# Altium PCB AnaCompPCB.PcbDoc
Units mil, origin at the board's own origin, x right, y up, seen from the top; angles counter-clockwise.
Board outline 1141.73 x 1417.32 mil, 2 copper layers (Top Layer, Bottom Layer); 19 components, 11 nets, 59 pads, 13 vias.
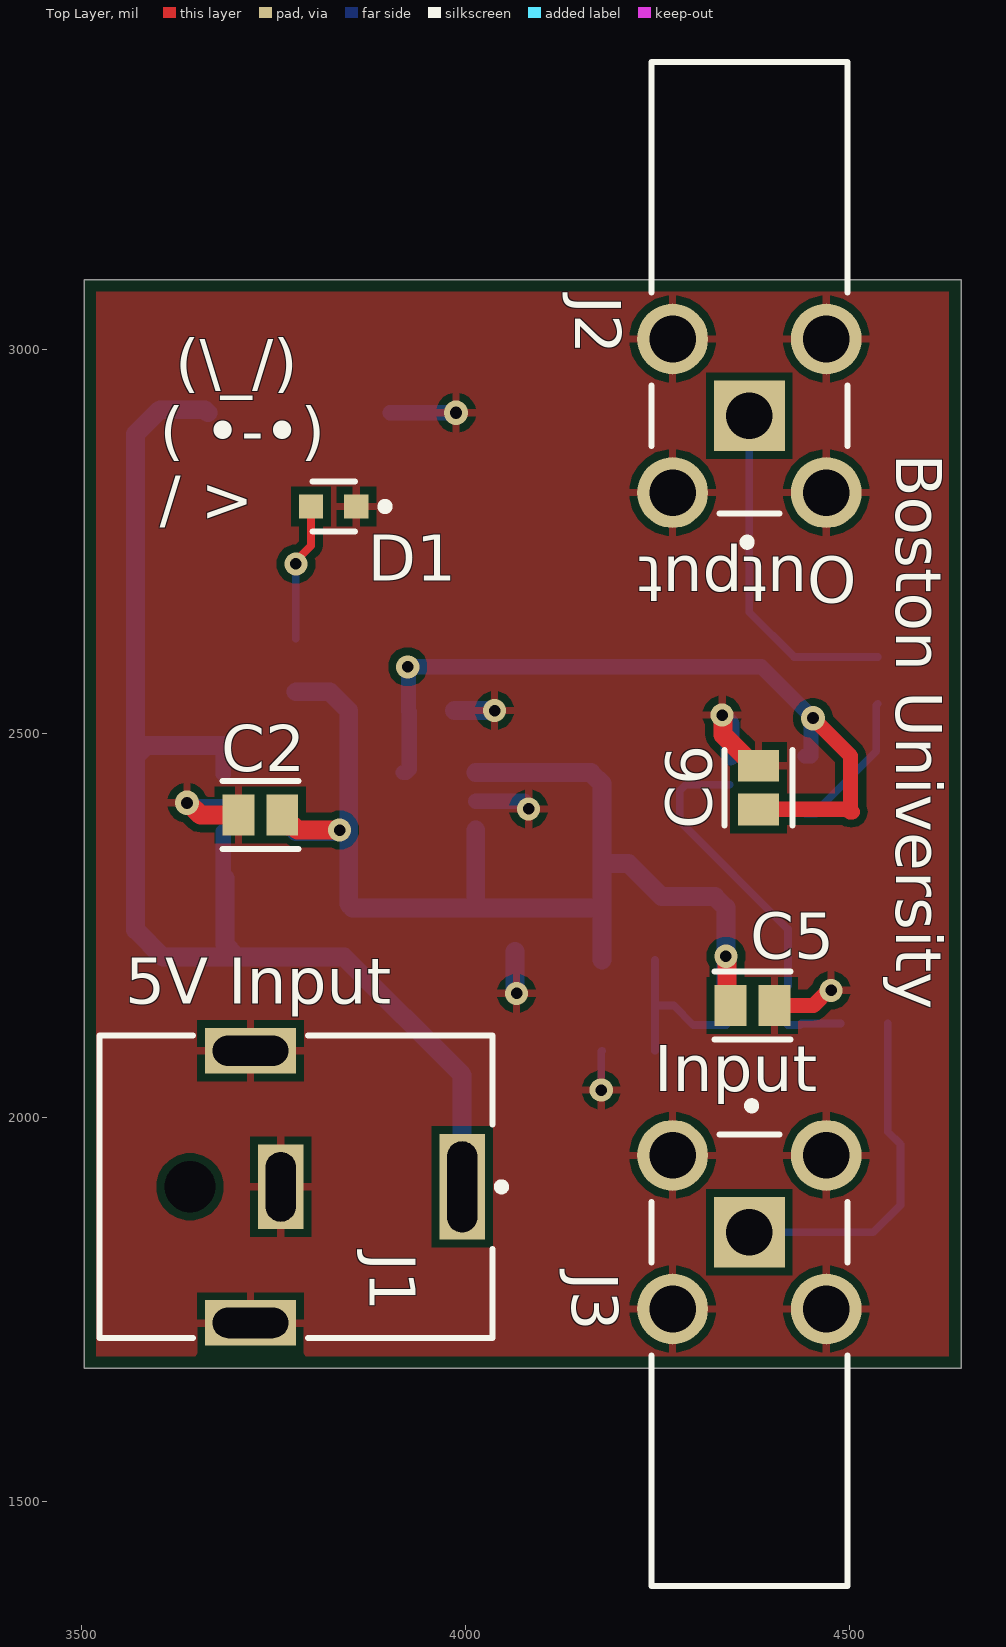
[diagram p0: Top Layer view]
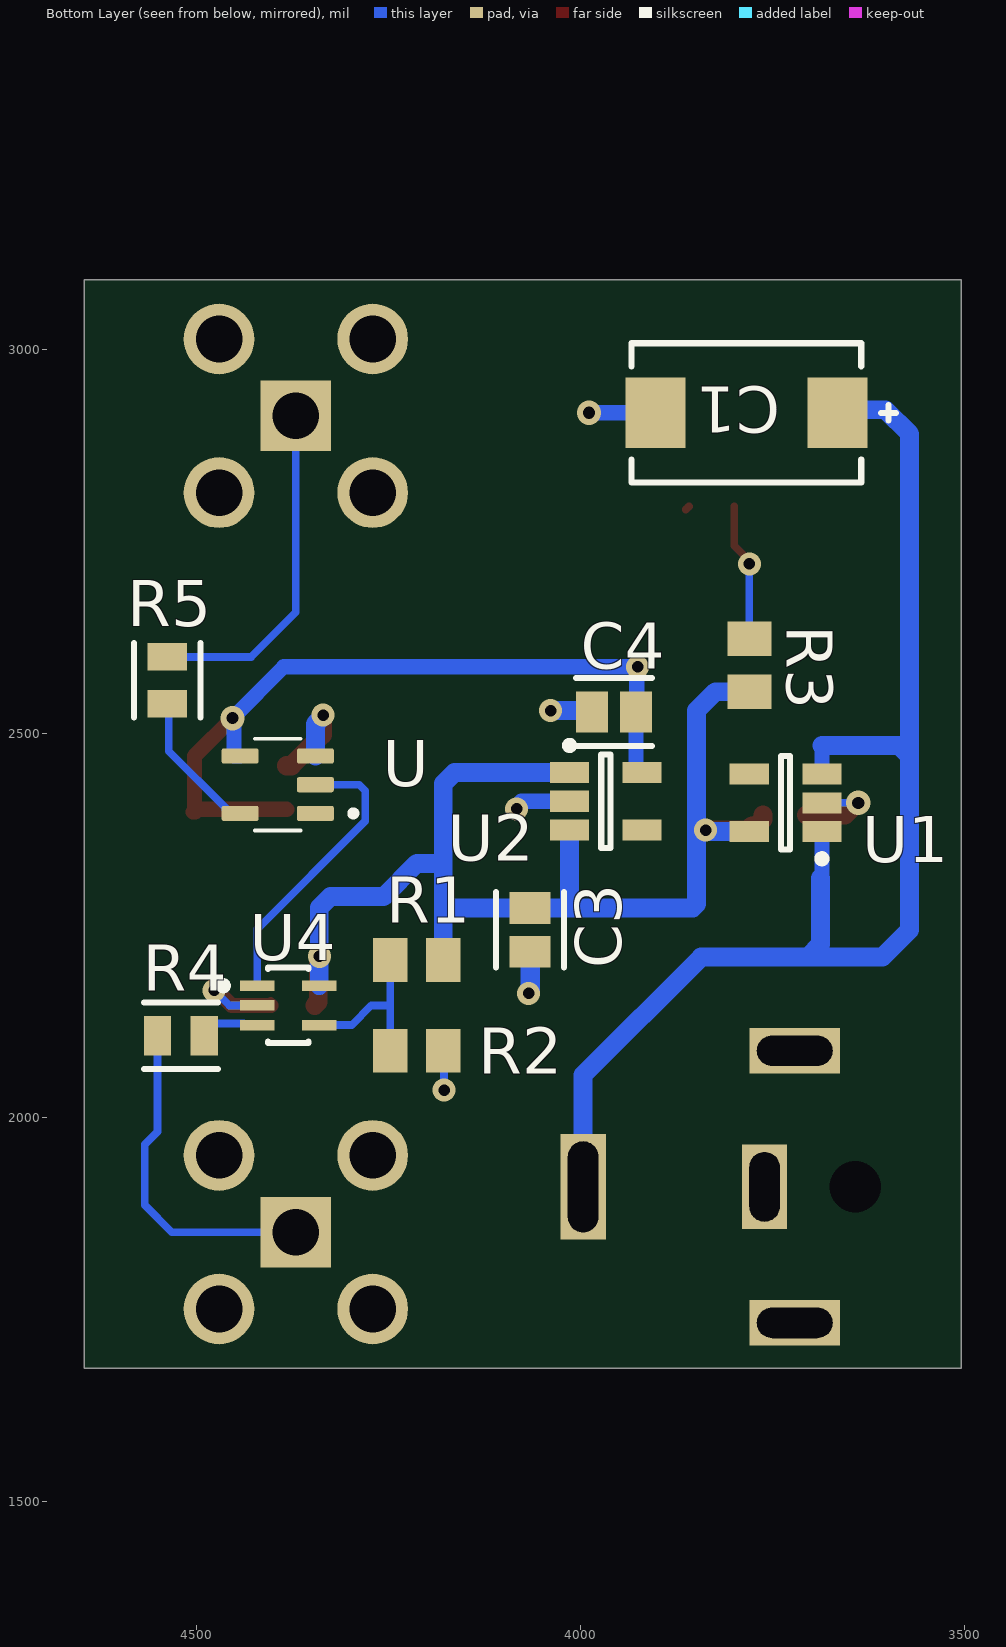
[diagram p1: Bottom Layer view, seen from below]
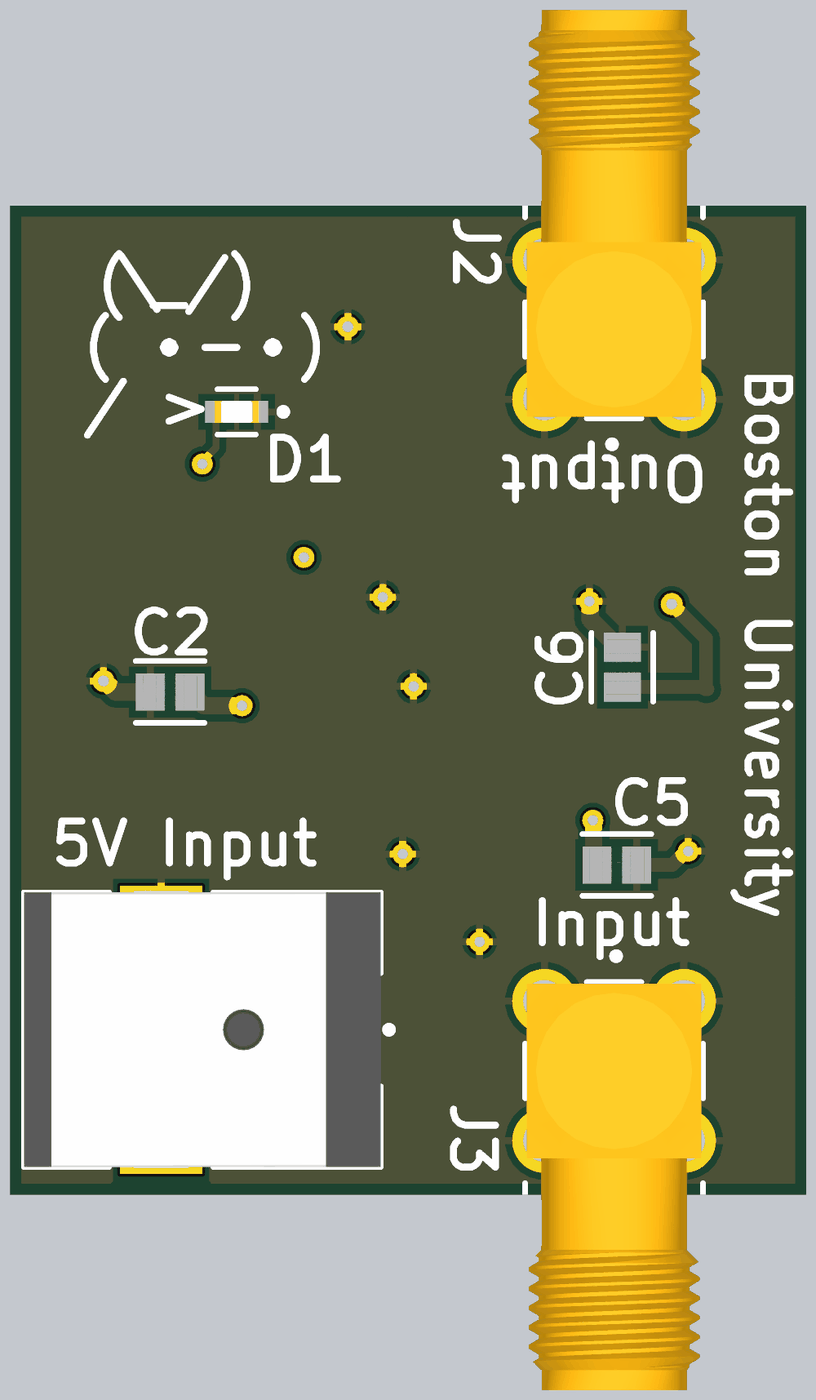
[diagram p2: 3D render of the assembled board from above, using the file's embedded part models]
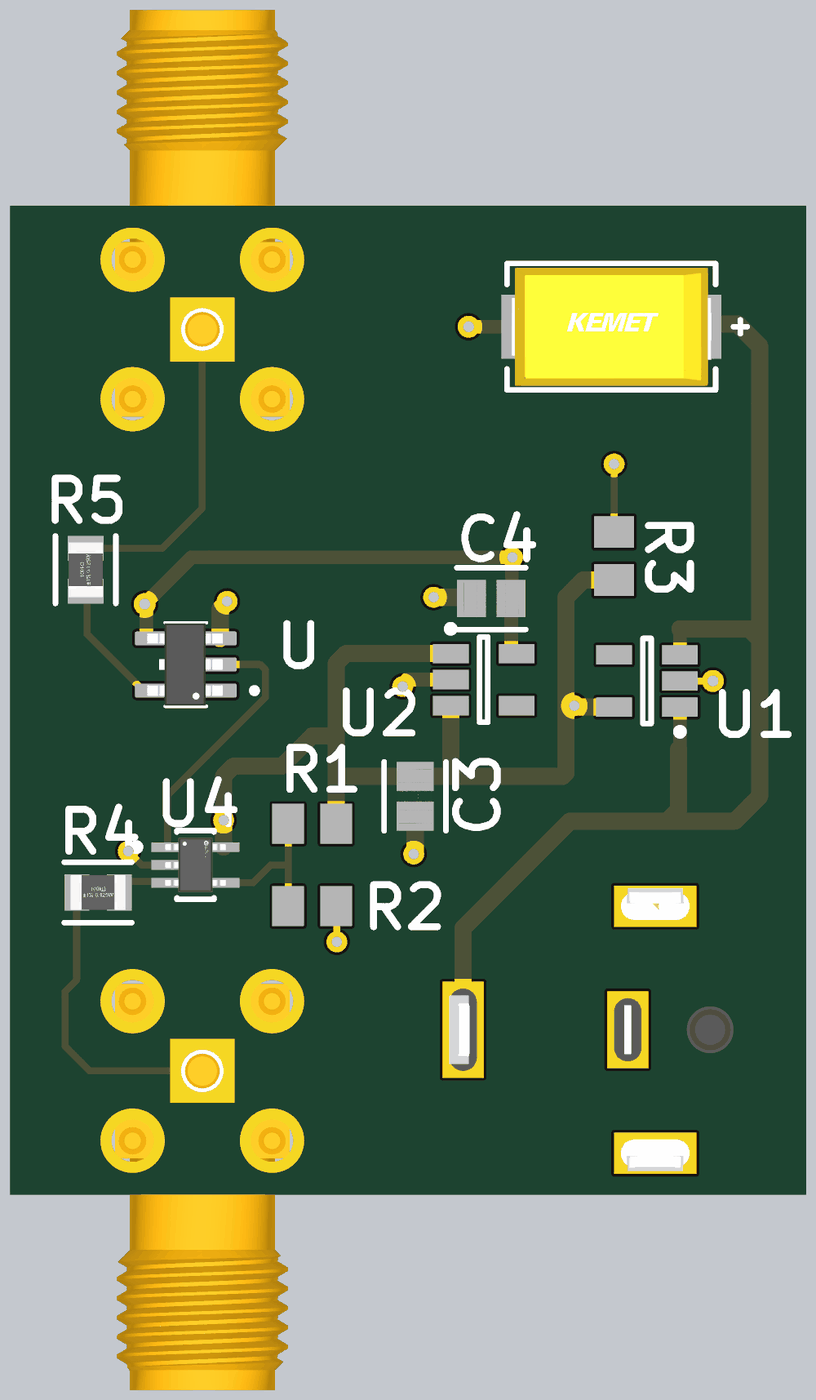
[diagram p3: 3D render of the assembled board from below, using the file's embedded part models]

## Layer stack, top to bottom
Top Solder: solder mask 0.4, Solder Resist, Dk 3.5
Top Layer: signal copper 1.4
Dielectric 1: dielectric 12.6, FR-4, Dk 4.8
Bottom Layer: signal copper 1.4
Bottom Solder: solder mask 0.4, Solder Resist, Dk 3.5

## Board outline
3503.94,1673.23 3503.94,3090.55 4645.67,3090.55 4645.67,1673.23

## Design rules (kind name [scope] priority, off if disabled: settings)
Clearance [All] p1: gap=10 ignorepadtopadclearanceinfootprint=FALSE except(0: Arc-Hole Track-Hole SMDPad-Hole THPad-Hole Via-Hole Fill-Hole Poly-Hole Region-Hole Text-Hole; 9.84: Arc-Arc Arc-Track Arc-SMDPad Arc-THPad Arc-Via Arc-Fill Arc-Poly Arc-Region Track-Track Track-SMDPad Track-THPad Track-Via Track-Fill Track-Poly Track-Region SMDPad-SMDPad SMDPad-THPad SMDPad-Via)
PolygonConnect [All] p1: connectstyle=Relief reliefconductorwidth=10 reliefentries=4 polygonreliefangle="90 Angle" airgapwidth=10
RoutingVias [All] p1: holewidth=15.75 width=31.5 viastyle="Through Hole" minholewidth=15.75 minwidth=31.5 maxholewidth=15.75 maxwidth=31.5
SolderMaskExpansion [All] p1: expansion=4 istentingtop=FALSE
Width [All] p1: maxlimit=27.56 minlimit=10 preferedwidth=10
30 further rules are at their usual default settings.

## Components (designator, comment, footprint, x,y, rotation, side; value= is the part's Value field where it differs from the comment)
C1 "47uF" FP-T491X476K035AT-MFG 3783.46,2917.32 r180 bottom
C2 "0.1uF" FP-CL21-IPC_C 3733.3,2393.7 r180 top
C3 "0.1uF" FP-CL21-IPC_C 4064.96,2244.09 r270 bottom
C4 "0.1uF" FP-CL21-IPC_C 3955.68,2527.56 r0 bottom
C5 "0.1uF" FP-CL21-IPC_C 4374.02,2145.67 r180 top
C6 "0.1uF" FP-CL21-IPC_C 4381.89,2429.13 r90 top
D1 "LTST-C193KRKT-5A" FP-LTST-C193KRKT-5A-MFG 3828.74,2795.28 r180 top
J1 "PJ-063AH" CUI-PJ-063AH_V 3759.84,1909.45 r180 top
J2 "73391-0083" FP-73391-0083-MFG 4370.08,3079.92 r270 top
J3 "73391-0083" FP-73391-0083-MFG 4370.08,1683.86 r90 top
R1 "149K ohm" RESC2013X50X40NL20T20 4212.6,2204.72 r180 bottom
R2 "12K ohm" RESC2013X50X40NL20T20 4212.6,2086.61 r0 bottom
R3 "1K ohm" RESC2013X50X40NL20T20 3779.53,2588.58 r270 bottom
R4 "33 ohm" FP-CRGCQ0805-IPC_C 4519.69,2106.3 r180 bottom value=33Ω
R5 "33 ohm" FP-CRGCQ0805-IPC_C 4537.4,2568.9 r90 bottom value=33Ω
U "74LV1T34GV-Q100H" SOT95P275X110-5N 4393.7,2433.07 r0 bottom
U1 "MCP1801T-3302I/OT" SOT-23-OT5_M 3732.28,2409.45 r0 bottom
U2 "MCP1801T-1802I/OT" SOT-23-OT5_M 3966.54,2411.42 r180 bottom
U4 "MAX49140AXK/V+" FP-X5-1C-MFG 4379.92,2145.67 r180 bottom

## Footprints (in the part's own frame and the unit in brackets; to place one, negate y for a bottom-side part, rotate by r counter-clockwise, add the part's x,y. Pads: shape width x height; smd on the part's side, far side on the other; paste and mask are expansions set on the pad)
CUI-PJ-063AH_V [mm] "THD, 2-Leads, Body 13x10mm, Height 9mm"
  rect 1.5x3.5 hole 1 slot 3 at 90 deg: 1(-6,0)
  rect 1.5x2.8 hole 1 slot 2.3 at 90 deg: 2(0,0)
  rect 3x1.5 hole 1 slot 2.5 at 0 deg: 3(1,4.5) 4(1,-4.5)
  round 1.4 hole 1.7 unplated: 5(3,0)
  silkscreen extent -7.42,-5 6,5, body extent -7,-5.15 6,5.15, height 9
FP-73391-0083-MFG [mm]
  rect 2.34x2.34 hole 1.54 paste-1000 mask+0: 1(4.23,0)
  round 2.34 hole 1.54 paste-1000 mask+0: 2(1.69,2.54) 3(6.77,2.54) 4(1.69,-2.54) 5(6.77,-2.54)
  silkscreen extent -7.46,-3.24 8.53,3.24, body extent -7.56,-3.81 8.04,3.81, height 0.25
FP-CL21-IPC_C [mil]
  rect 41.52x53.39 smd paste+0 mask+0: 1(-28.57,0) 2(28.57,0)
  silkscreen extent -49,-44 49,44, body extent -39,-25 39,25, height 57
FP-CRGCQ0805-IPC_C [mil]
  rect 35.67x51.57 smd paste+0 mask+0: 1(-30.55,0) 2(30.55,0)
  silkscreen extent -48,-43 48,43, body extent -39,-25 39,25, height 26
FP-LTST-C193KRKT-5A-MFG [mm]
  rect 0.8x0.8 smd paste+0 mask+0: 1(-0.75,0) 2(0.75,0)
  silkscreen extent -1.83,-0.82 0.7,0.82, body extent -1.25,-0.55 1.25,0.55, height 0.25
FP-T491X476K035AT-MFG [mm]
  rect 1.99x2.33 smd paste+0 mask+0: 1(-3.01,0) 2(3.01,0)
  silkscreen extent -3.8,-2.3 4.95,2.3, body extent -3.65,-2.15 3.65,2.15, height 4.3
FP-X5-1C-MFG [mm]
  rect 1.15x0.35 smd paste+0 mask+0: 1(-1.025,0.65) 2(-1.025,0) 3(-1.025,-0.65) 4(1.025,-0.65) 5(1.025,0.65)
  silkscreen extent -2.28,-1.25 0.67,1.25, body extent -1.1,-1 1.1,1, height 1.1
RESC2013X50X40NL20T20 [mm] "Chip Resistor, 2-Leads, Body 2.00x1.25mm, IPC Medium Density"
  rect 1.15x1.45 smd: 1(-0.875,0) 2(0.875,0)
  body extent -1.1,-0.72 1.1,0.72, height 0.5
SOT95P275X110-5N [mm]
  rrect25% 1.22x0.5 smd: 1(-1.245,0.95) 2(-1.245,0) 3(-1.245,-0.95) 4(1.245,-0.95) 5(1.245,0.95)
  silkscreen extent -2.6,-1.52 0.75,1.52, body extent -1.34,-1.5 1.41,1.5, height 1.1
SOT-23-OT5_M [mm] "SOT23, 5-Leads, Body 2.9x1.7mm, Pitch 0.95mm, Lead Span 2.8mm, IPC Low Density"
  rect 1.3x0.7 smd: 1(-1.2,0.95) 2(-1.2,0) 3(-1.2,-0.95) 4(1.2,-0.95) 5(1.2,0.95)
  silkscreen extent -1.32,-1.55 0.15,1.97, body extent -0.9,-1.55 0.9,1.55, height 1.45

## Part data
C1: library part CMP-03017-000044-1, "CAP TANT 47UF 10% 35V 2917 Part: T491X476K035AT", Case Code (Imperial)=2917, Case Code (Metric)=7343, Dielectric Material=Tantalum, ESR (Equivalent Series Resistance)=600mR, Leakage Current=16.5uA, Max Operating Temperature=125°C, Min Operating Temperature=-55°C, Package Quantity=1, Ripple Current=524mA, Tolerance=10%, Voltage=35V, Capacitance=47uF, Case/Package=2917, Construction=Flat, Depth=4.3mm, Dissipation Factor=8%, Features="General Purpose", Height=4mm, Height - Seated (Max)=0.169inch, Lead Free="Lead Free", Length=7.3mm, Life (Hours)=2000Hour, Mount="Surface Mount", Number of Pins=2, Packaging="Tape and Reel", Polarity=Polar, Radiation Hardening=No, REACH SVHC="No SVHC", RoHS Compliant=Yes, Series=T491, Termination=SMD/SMT, Voltage Rating=35V, Voltage Rating (DC)=35V, Width=4.3mm
C2 C3 C4 C5 C6: library part CMP-13271-002854-1, "CL21 Series 0805 100nF 25V ±10% Tolerance X7R Multilayer Ceramic Chip Capacitor", Capacitance=100nF, Case Code (Imperial)=0805, Case Code (Metric)=2012, Dielectric=X7R, Max Operating Temperature=125°C, Min Operating Temperature=-55°C, Package Quantity=1, Tolerance=10%, Voltage=25V, Case/Package=0805, Contact Plating=Tin, Depth=1.25mm, Height=0.85mm, Length=2mm, Mount="Surface Mount", Packaging="Tape and Reel", Radiation Hardening=No, Thickness=0.037inch, Voltage Rating=25V, Width=0.049inch
D1: library part CMP-2000-06623-2, "LED RED CLEAR CHIP SMD", Case Code (Imperial)=0603, Case Code (Metric)=1608, Color=Red, Forward Current=5mA, Forward Voltage=2.3V, Lens Color=Colorless, Max Operating Temperature=85°C, Min Operating Temperature=-55°C, Package Quantity=3000, Power Dissipation=50mW, Reverse Voltage=5V, Case/Package=0603, Depth=0.8mm, Dominant Wavelength=631nm, Height=0.35mm, Illumination Color=Red, Lead Free="Lead Free", Length=1.6mm, Lens Style=Diffused, Lens Transparency=Clear, Luminous Intensity=45mcd, Mount="Surface Mount", Number of Elements=1, Number of LEDs=1, Number of Pins=2, Packaging="Tape and Reel", Radiation Hardening=No, Test Current=5mA, Viewing Angle=130°, Width=0.8mm
J1: library part CMP-2000-06898-1, "Through Hole Right Angle DC Power Jack, 8 A, 2 mm Center Pin, 2 Position, -25 to 85 degC, RoHS, Bulk", Current Rating=8A, Flammability Rating=UL94V-0, Insulation Resistance=100MOhms, Manufacturer=CUIInc., Operating Temperature Range=-25Cto+85C, Package Description="2-Pin Through Hole Device, Body 13 x 10 mm, Height 9 mm", Voltage Rating=24V, Brand=CUI, Connector Type=DCPowerJack, Contact Gender=Male, Contact Material=Copper, Contact Plating=Nickel, Datasheet URL=http://www.cui.com/product/resource/pj-063ah.pdf, Datasheet Version="Rev. 1.02, 03/2016", Factory Pack Quantity=500, Housing Material=PolybutyleneTerephthalate(PBT), Inside Contact Diameter=2mm, Manufacturer URL=http://www.cui.com/, Mounting Angle=Right, Mounting Style=KinkedPin, Mounting Technology=ThroughHole, Outside Contact Diameter=6.5mm, Package Reference=PJ-063AH, Product=Jacks, Product Category=DCPowerConnectors, RoHS=True, Termination Style=ThroughHole
J2 J3: library part CMP-04764-000017-1, "SMA RA JACK, PCB", Case/Package=SMA, Body Plating=Gold, Connector Type=SMA, Contact Material=Copper, Contact Plating=Gold, Gender=Female, Impedance=50R, Mount=PCB, Orientation="Right Angle", REACH SVHC="No SVHC", RoHS Compliant=Yes, Termination=Solder
R1 R2 R3: library part CMP-2001-04812-1, Manufacturer=Susumu, Part Number=RG2012N-123-W-T1
R4 R5: library part CMP-03211-008574-1, "CRGCQ0805 33Ω 0.125W ±200ppm/°C 1% 150V", Ambient Temperature Range High=+70°C, Manufacturer="TE Connectivity", Manufacturer Part Number=CRGCQ0805F33R, Package=CRGCQ0805, Power Rating=0.125W, Resistance=33Ω, Temperature="-55°C to +155°C", Temperature Coefficient=±200ppm/°C, Temperature Range High=+155°C, Temperature Range Low=-55°C, Tolerance=0.01, Voltage Rating=150V, Automotive=Yes, Automotive Grade="Grade 343", Category=Res, ComponentLink2Description=Datasheet, ComponentLink2URL=https://www.te.com/commerce/DocumentDelivery/DDEController?Action=showdoc&DocId=Data+Sheet%7F1773204-3%7F1%7Fpdf%7FEnglish%7FENG_DS_1773204-3_1.pdf%7F4-2176341-352, Composition="Thick Film", Device Class L1="Passive Components", Device Class L2=Resistors, Device Class L3="Chip SMD Resistors", Height=0.65mm, Ipc Land Pattern Name=RESC200125X55, Lead Free=Yes, Octopart=https://octopart.com/crgcq0805f33r-te+connectivity-91018172, RoHS=TRUE, Series=CRGCQ
U: "Level Shifter"
U1: library part CMP-0136-00719-1, "150 mA, High PSRR, Low Quiescent Current LDO, 5-Pin SOT-23, Industrial Temperature, Tape and Reel", Code_IPC=SOT23-5, DatasheetVersion="revC, Jan-2009", PackageDescription="5-Lead Plastic Small Outline Transistor (OT) [SOT-23]", PackageReference=SOT-23-OT5, PackageVersion="revBB, Aug-2009"
U2: library part CMP-0136-00723-1, "150 mA, High PSRR, Low Quiescent Current LDO, 5-Pin SOT-23, Industrial Temperature, Tape and Reel", Code_IPC=SOT23-5, DatasheetVersion="revC, Jan-2009", PackageDescription="5-Lead Plastic Small Outline Transistor (OT) [SOT-23]", PackageReference=SOT-23-OT5, PackageVersion="revBB, Aug-2009"
U4: library part CMP-05700-000010-1, "30NS, LOW-POWER, 3V/5V, RAIL-TO-"

## Via types
v1: diameter 30, hole 15, Top Layer to Bottom Layer, 10 vias
v2: diameter 31.5, hole 15.75, Top Layer to Bottom Layer, 3 vias

## Nets (pads, with @x,y where several pads share a name; then routed paths per layer and width w, separated by ;. In a path a pad name is that pad's centre, name@x,y a point inside that pad or via, vN(x,y) a via of type N, cw(c..) or ccw(c..) an arc to the next point about the centre after c; other vN are vias at no path point)
1V8: C4.1 C6.1 U2.5 U.4 | length 1024.2
  Top Layer w19.68: C6.1 4382.4,2401.07 4497.72,2401.07 4501.15,2397.64 4503.94,2397.64 4501.96,2399.61 4501.96,2470.48 v2(4452.76,2519.68)
  Bottom Layer w19.68: U2.5 3923.17,2448.82 3927.1,2452.76 C4.1 3926.15,2528.51 3926.15,2585.66 v1(3925.2,2586.61) 4385.83,2586.61 v2(4452.76,2519.68) 4450.5,2517.43 4450.5,2470.47 U.4
3V3: C2.1 C3.1 C5.2 R1.2 R3.2 U1.5 U2.1 U2.3 U4.5 | length 1674.6
  Top Layer w24.61: C2.1 3761.87,2387.76 3770.33,2379.31 3776.27,2379.31 3781.56,2374.02 v1(3836.61,2374.02) ; v1(4339.57,2209.7) 4340.89,2208.38 4340.89,2150.23 C5.2
  Bottom Layer w24.61: U1.5 3846.46,2372.05 v1@3848.43,2374.02 ; R3.2 3823.82,2554.13 3848.43,2529.53 v1@3848.43,2374.02 ; U2.3 4013.78,2274.64 4015.75,2272.67 ; U2.1 4163.74,2448.82 4178.15,2434.4 4178.15,2330.71 ; R1.2 4178.15,2272.67 ; U4.5 v1(4339.57,2209.7) 4339.57,2272.99 4325.15,2287.4 4255.91,2287.4 4212.6,2330.71 4178.15,2330.71 ; v1@3848.43,2374.02 3848.43,2277.56 3853.32,2272.67 4015.75,2272.67 ; 4015.75,2272.67 C3.1 4178.15,2272.67 ; 4178.15,2272.67 4178.15,2330.71
comp_out: U4.1 U.2 | length 380.7
  Bottom Layer w10: U.2 4287.4,2433.07 4279.53,2425.2 4279.53,2385.83 4420.28,2245.08 U4.1
GND: C1.1 C2.2 C3.2 C4.2 C5.1 C6.2 D1.1 J1.2 J1.3 J1.4 J2.2 J2.3 J2.4 J2.5 J3.2 J3.3 J3.4 J3.5 R2.1 U1.2 U2.2 U4.2 U.3 | length 735.3
  Top Layer w10: D1.1 D1.1@3862.2,2791.34 ; C5.1 C5.1@4402.59,2151.61
  Top Layer w19.68: C5.1 4453.5,2145.67 4473.18,2165.35 v1(4476.38,2165.35)
  Top Layer w25: v2(3637.8,2409.45) 3639.55,2409.45 3655.3,2393.7 C2.2 ; v1(4334.65,2523.62) 4335.6,2522.67 4335.6,2498.06 4375.95,2457.71 C6.2
  Bottom Layer w10: v2(3637.8,2409.45) U1.2 ; C4.2 C4.2@3986.22,2529.53 ; v1(4177.17,2035.43) 4177.17,2085.63 R2.1 ; U4.2 4456.69,2145.67 v1(4476.38,2165.35)
  Bottom Layer w19.68: C1.1 v2(3988.19,2917.32)
  Bottom Layer w20: U2.2 v1@4076.77,2411.42
  Bottom Layer w25: C4.2@3986.22,2529.53 v1(4038.36,2529.53) ; C3.2 4064.96,2164.74 4066.93,2162.77 v1(4066.93,2161.42) ; v1(4334.65,2523.62) 4334.65,2522.27 4344.69,2512.23 U.3
  other v1: 4082.68,2401.57
in: J3.1 R4.1 | length 454.7
  Bottom Layer w10: J3.1 4531.5,1850.39 4566.93,1885.83 4566.93,1964.57 4550.24,1981.26 R4.1@4550.24,2122.05
in_term: R4.2 U4.3 | length 69.7
  Bottom Layer w10: U4.3 4436.02,2120.08 4437.99,2122.05 R4.2@4489.13,2122.05
led_k: D1.2 R3.1 | length 187.6
  Top Layer w10: v1@3771.65,2716.54 3799.21,2744.09 D1.2
  Bottom Layer w10: R3.1 v1(3779.53,2720.47)
out: R5.1 U.5 | length 190.2
  Bottom Layer w10: U.5 4456.89,2395.67 4461.73,2400.51 4461.73,2402.97 4535.43,2476.67 4535.43,2536.37 R5.1
out_term: J2.1 R5.2 | length 447.3
  Bottom Layer w10: J2.1 4370.08,2657.48 4428.11,2599.45 R5.2
vin: C1.2 J1.1 U1.1 U1.3 | length 1751.8
  Bottom Layer w19.68: U1.1 3685.04,2313.65 3687.01,2311.68 ; U1.3 3685.04,2484.25
  Bottom Layer w24.61: C1.2 3661.02,2921.26 3602.36,2921.26 3570.87,2889.76 3570.87,2469.84 ; 3685.04,2484.25 3585.28,2484.25 3570.87,2469.84 ; 3687.01,2311.68 3687.01,2225.04 3703.39,2208.66 ; J1.1@3996.06,1889.76 3996.06,2055.12 3842.52,2208.66 3703.39,2208.66 ; 3570.87,2469.84 3570.87,2244.09 3606.3,2208.66 3703.39,2208.66
vth: R1.1 R2.2 U4.4 | length 221.2
  Bottom Layer w10: R2.2 4247.05,2145.67 ; R1.1 4247.05,2145.67 ; U4.4 4297.24,2120.08 4271.65,2145.67 4247.05,2145.67
pads on no net: J1.5 U1.4 U2.4 U.1

## Polygon pours and split planes (outlines as drawn)
GND on Top Layer "GND_L01_P002" (solid, pour order 2): 3519.68,1688.98 3519.68,3074.8 4629.92,3074.8 4629.92,1688.98

## Silkscreen, mask and mechanical layers (free items; w line width, h text height)
Top Overlay:
  text "(\_/)" at 3622.2,2953.07 h60
  text "( •-•)" at 3602.52,2864.33 h60
  text "Boston University" at 4561.49,2864.02 h60 r270
  text "/ >" at 3602.52,2775.75 h60
  text "Output" at 4509.69,2729.85 h60 r180
  text "5V Input" at 3557.24,2148.1 h60
  text "Input" at 4246.22,2033.93 h60
Mechanical 1:
  lines w10: 3503.94,1673.23 3523.62,1673.23 4645.67,1673.23 4645.67,3090.55 3503.94,3090.55 3503.94,1673.23